# Altium PCB pay-led-2-v3.PcbDoc
Units mm, origin at the board's own origin, x right, y up, seen from the top; angles counter-clockwise.
Board outline 138 x 15 mm, 4 copper layers (Top Layer, GND, PWR, Bottom Layer), stack 0.778 mm thick; 54 components, 47 nets, 155 pads, 55 vias.
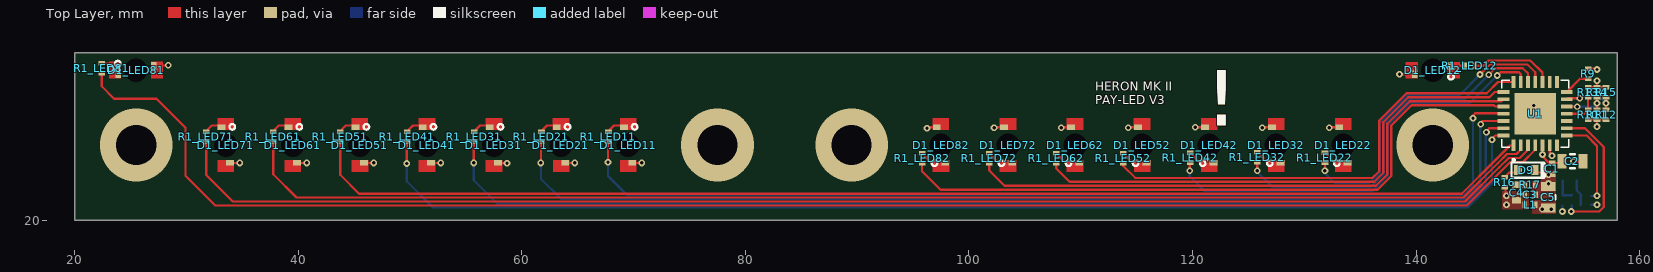
[diagram p0: Top Layer view]
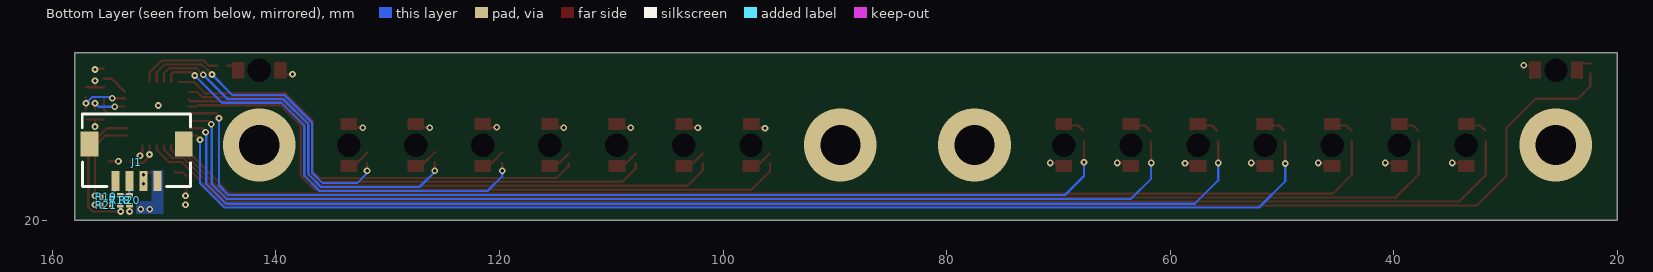
[diagram p1: Bottom Layer view, seen from below]
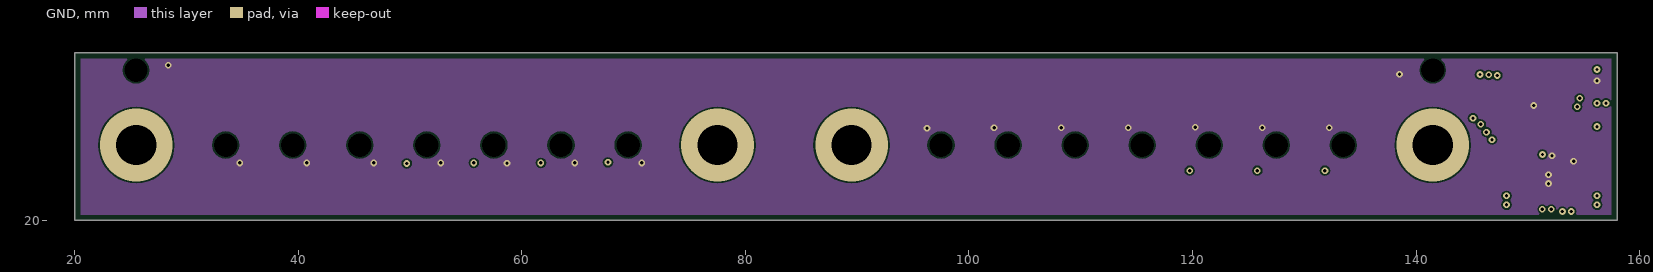
[diagram p2: GND]
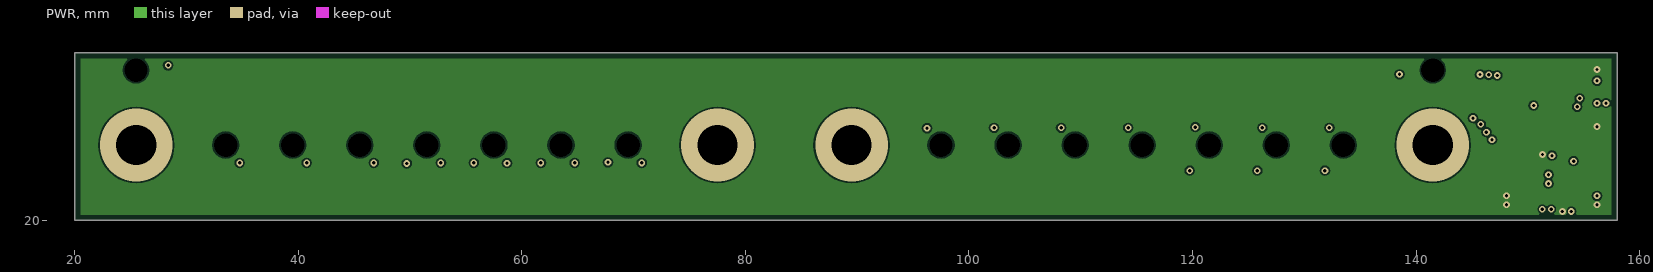
[diagram p3: PWR]
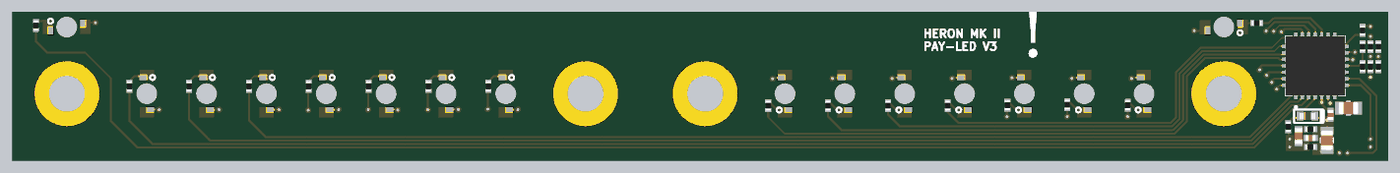
[diagram p4: 3D render of the assembled board from above, using the file's embedded part models]
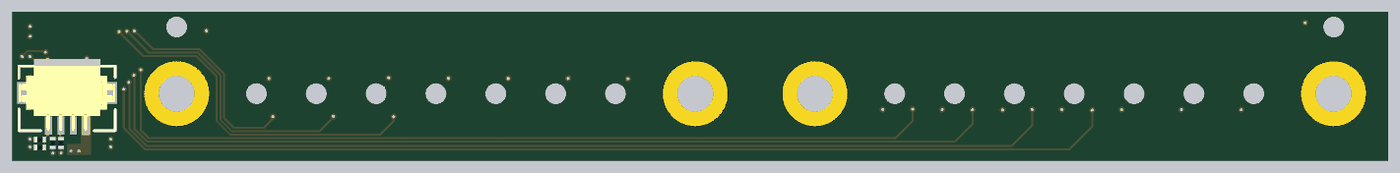
[diagram p5: 3D render of the assembled board from below, using the file's embedded part models]

## Layer stack, top to bottom
Top Solder: solder mask 0.0102, Solder Resist, Dk 3.5
Top Layer: signal copper 0.0356
Dielectric 1: core 0.254, FR-4, Dk 4.2
GND: signal copper 0.036
Dielectric 3: prepreg 0.127, Dk 4.2
PWR: signal copper 0.036
Dielectric 2: core 0.254, Dk 4.2
Bottom Layer: signal copper 0.0356
Bottom Solder: solder mask 0.0102, Solder Resist, Dk 3.5

## Board outline
20,20 158,20 158,35 20,35

## Design rules (kind name [scope] priority, off if disabled: settings)
AssemblyTestPointUsage [All] p1 off:
AssemblyTestpoint [All] p1 off: testpointundercomponent=TRUE minsize=1.016 maxsize=2.54 preferedsize=1.524 minholesize=0 maxholesize=1.016 preferedholesize=0.813 testpointgrid=0.025 usegrid=TRUE gridtolerance=0 allowsidetop=TRUE allowsidebottom=TRUE
BoardOutlineClearance [All] p1: gap=0.5 ignorepadtopadclearanceinfootprint=FALSE
Clearance Component_Clearance [IsComponent vs IsComponent] p1: gap=0.254 ignorepadtopadclearanceinfootprint=FALSE
Clearance [All] p2: gap=0.152 ignorepadtopadclearanceinfootprint=TRUE
FabricationTestPointUsage [All] p1 off: valid=0 allowmultiple=FALSE
FabricationTestpoint [All] p1 off: side=3 testpointundercomponent=FALSE minsize=1.016 maxsize=2.54 preferedsize=1.524 minholesize=0 maxholesize=1.016 preferedholesize=0.813 testpointgrid=0.025 allowsidetop=TRUE allowsidebottom=TRUE usegrid=TRUE gridtolerance=0
HoleSize [All] p1: absolutevalues=TRUE maxlimit=6.3 minlimit=0.3 maxpercent=80.000 minpercent=20.000
HoleToHoleClearance [All] p1: gap=0.2 allowstackedmicrovias=FALSE
MinimumAnnularRing [All] p1: minimumring=0.15
MinimumSolderMaskSliver [All] p1: minsoldermaskwidth=0.1
PlaneClearance [All] p1: clearance=0.381
PlaneConnect [All] p1: planeconnectstyle=Direct reliefexpansion=0.508 reliefentries=4 reliefconductorwidth=0.254 reliefairgap=0.254
PolygonConnect [All] p1: connectstyle=Direct reliefconductorwidth=0.254 reliefentries=4 polygonreliefangle="90 Angle" airgapwidth=0.254
RoomDefinition LED82 [InComponentClass('LED82')] p1: confinementstyle=ConfineIn formatcopy=TRUE lockcomponents=FALSE outline 94.5,24 100.5,24 100.5,29.5 94.5,29.5
RoomDefinition LED81 [InComponentClass('LED81')] p2: confinementstyle=ConfineIn formatcopy=FALSE lockcomponents=FALSE outline 21.9,30.75 29.1,30.75 29.1,36.25 21.9,36.25
RoomDefinition LED72 [InComponentClass('LED72')] p3: confinementstyle=ConfineIn formatcopy=TRUE lockcomponents=FALSE outline 100.5,24 106.5,24 106.5,29.5 100.5,29.5
RoomDefinition LED71 [InComponentClass('LED71')] p4: confinementstyle=ConfineIn formatcopy=FALSE lockcomponents=FALSE outline 30.5,24 36.5,24 36.5,29.5 30.5,29.5
RoomDefinition LED62 [InComponentClass('LED62')] p5: confinementstyle=ConfineIn formatcopy=TRUE lockcomponents=FALSE outline 106.5,24 112.5,24 112.5,29.5 106.5,29.5
RoomDefinition LED61 [InComponentClass('LED61')] p6: confinementstyle=ConfineIn formatcopy=FALSE lockcomponents=FALSE outline 36.5,24 42.5,24 42.5,29.5 36.5,29.5
RoomDefinition LED52 [InComponentClass('LED52')] p7: confinementstyle=ConfineIn formatcopy=TRUE lockcomponents=FALSE outline 112.5,24 118.5,24 118.5,29.5 112.5,29.5
RoomDefinition LED51 [InComponentClass('LED51')] p8: confinementstyle=ConfineIn formatcopy=FALSE lockcomponents=FALSE outline 42.5,24 48.5,24 48.5,29.5 42.5,29.5
RoomDefinition LED42 [InComponentClass('LED42')] p9: confinementstyle=ConfineIn formatcopy=TRUE lockcomponents=FALSE outline 118.5,24 124.5,24 124.5,29.5 118.5,29.5
RoomDefinition LED41 [InComponentClass('LED41')] p10: confinementstyle=ConfineIn formatcopy=FALSE lockcomponents=FALSE outline 48.5,24 54.5,24 54.5,29.5 48.5,29.5
RoomDefinition LED32 [InComponentClass('LED32')] p11: confinementstyle=ConfineIn formatcopy=TRUE lockcomponents=FALSE outline 124.5,24 130.5,24 130.5,29.5 124.5,29.5
RoomDefinition LED31 [InComponentClass('LED31')] p12: confinementstyle=ConfineIn formatcopy=FALSE lockcomponents=FALSE outline 54.5,24 60.5,24 60.5,29.5 54.5,29.5
RoomDefinition LED22 [InComponentClass('LED22')] p13: confinementstyle=ConfineIn formatcopy=TRUE lockcomponents=FALSE outline 130.5,24 136.5,24 136.5,29.5 130.5,29.5
RoomDefinition LED21 [InComponentClass('LED21')] p14: confinementstyle=ConfineIn formatcopy=FALSE lockcomponents=FALSE outline 60.5,24 66.5,24 66.5,29.5 60.5,29.5
RoomDefinition LED12 [InComponentClass('LED12')] p15: confinementstyle=ConfineIn formatcopy=FALSE lockcomponents=FALSE outline 138.75,36.5 138.75,30.5 144.25,30.5 144.25,36.5
RoomDefinition LED11 [InComponentClass('LED11')] p16: confinementstyle=ConfineIn formatcopy=FALSE lockcomponents=FALSE outline 66.5,24 72.5,24 72.5,29.5 66.5,29.5
RoutingVias [All] p1: holewidth=0.3 width=0.6 viastyle="Through Hole" minholewidth=0.2 minwidth=0.6 maxholewidth=6.3 maxwidth=10 useviatemplates=TRUE viatemplateguid#1={CC9E0A90-9CCD-40F9-98FD-64835F8DE6C6} viatemplatename#1=v60h30m0mx0(Tol8-8)
SilkToSilkClearance [All] p1: silktosilkclearance=0
SilkToSolderMaskClearance [IsPad] p1: minsilkscreentomaskgap=0.2 clearancetoexposedcopper=TRUE
SolderMaskExpansion [All] p1: expansion=0.051
UnConnectedPin [All] p1:
UnRoutedNet [All] p1: checkbadconnections=TRUE
Width [All] p1: maxlimit=25.4 minlimit=0.152 preferedwidth=0.2
18 further rules are at their usual default settings.

## Classes and differential pairs
channel class LED: LED11 LED12 LED21 LED22 LED31 LED32 LED41 LED42 LED51 LED52 LED61 LED62 LED71 LED72 LED81 LED82
component class LED82: D1_LED82 R1_LED82
component class LED81: D1_LED81 R1_LED81
component class LED72: D1_LED72 R1_LED72
component class LED71: D1_LED71 R1_LED71
component class LED62: D1_LED62 R1_LED62
component class LED61: D1_LED61 R1_LED61
component class LED52: D1_LED52 R1_LED52
component class LED51: D1_LED51 R1_LED51
component class LED42: D1_LED42 R1_LED42
component class LED41: D1_LED41 R1_LED41
component class LED32: D1_LED32 R1_LED32
component class LED31: D1_LED31 R1_LED31
component class LED22: D1_LED22 R1_LED22
component class LED21: D1_LED21 R1_LED21
component class LED12: D1_LED12 R1_LED12
component class LED11: D1_LED11 R1_LED11
channel class "LED Bank": LED1 LED2
component class TOP: J1 R18 R19 R20 R21
component class PWR: C3 C4 C5 D9 L1 R16 R17
component class PEX: C1 C2 R9 R10 R11 R12 R15 U1

## Components (designator, comment, footprint, x,y, rotation, side; value= is the part's Value field where it differs from the comment)
C1 "0402" CAP0402R 152.2,24.625 r90 top value=0.1uF
C2 "0805" CAP0805R 154,25.3 r180 top value=10uF
C3 "0402" CAP0402R 150.2,22.3 r180 top value=10000pF
C4 "0603" CAP0603R 149,22.5 r270 top value=1uF
C5 "0805" CAP0805R 151.85,22.075 r270 top value=10uF
D1_LED11 "LOP47K" "LB P4SG" 69.5,26.75 r270 top (schematic designator D1)
D1_LED12 "LOP47K" "LB P4SG" 141.5,33.45 r180 top (schematic designator D1)
D1_LED21 "LOP47K" "LB P4SG" 63.5,26.75 r270 top (schematic designator D1)
D1_LED22 "LOP47K" "LB P4SG" 133.5,26.75 r90 top (schematic designator D1)
D1_LED31 "LOP47K" "LB P4SG" 57.5,26.75 r270 top (schematic designator D1)
D1_LED32 "LOP47K" "LB P4SG" 127.5,26.75 r90 top (schematic designator D1)
D1_LED41 "LOP47K" "LB P4SG" 51.5,26.75 r270 top (schematic designator D1)
D1_LED42 "LOP47K" "LB P4SG" 121.5,26.75 r90 top (schematic designator D1)
D1_LED51 "LOP47K" "LB P4SG" 45.5,26.75 r270 top (schematic designator D1)
D1_LED52 "LOP47K" "LB P4SG" 115.5,26.75 r90 top (schematic designator D1)
D1_LED61 "LOP47K" "LB P4SG" 39.5,26.75 r270 top (schematic designator D1)
D1_LED62 "LOP47K" "LB P4SG" 109.5,26.75 r90 top (schematic designator D1)
D1_LED71 "LOP47K" "LB P4SG" 33.5,26.75 r270 top (schematic designator D1)
D1_LED72 "LOP47K" "LB P4SG" 103.5,26.75 r90 top (schematic designator D1)
D1_LED81 "LOP47K" "LB P4SG" 25.475,33.45 r0 top (schematic designator D1)
D1_LED82 "LOP47K" "LB P4SG" 97.5,26.75 r90 top (schematic designator D1)
D9 "LED0603" LED0603 149.875,24.5 r0 top
J1 "DF13A-4P-1.25H(51)" DF13A-4P-1.25H(51) 153.725,25.5 r180 bottom locked
L1 "2A 0402" RES0402R 150.2,21.4 r180 top value="120 Ohm @ 100MHz"
R1_LED11 "0402" RES0402R 67.75,27.5 r90 top value=330 (schematic designator R1)
R1_LED12 "0402" RES0402R 144.8,33.85 r180 top value=330 (schematic designator R1)
R1_LED21 "0402" RES0402R 61.75,27.5 r90 top value=330 (schematic designator R1)
R1_LED22 "0402" RES0402R 131.85,25.6 r90 top value=330 (schematic designator R1)
R1_LED31 "0402" RES0402R 55.75,27.5 r90 top value=330 (schematic designator R1)
R1_LED32 "0402" RES0402R 125.8,25.65 r90 top value=330 (schematic designator R1)
R1_LED41 "0402" RES0402R 49.75,27.5 r90 top value=330 (schematic designator R1)
R1_LED42 "0402" RES0402R 119.8,25.6 r90 top value=330 (schematic designator R1)
R1_LED51 "0402" RES0402R 43.75,27.5 r90 top value=330 (schematic designator R1)
R1_LED52 "0402" RES0402R 113.812,25.55 r90 top value=330 (schematic designator R1)
R1_LED61 "0402" RES0402R 37.75,27.5 r90 top value=330 (schematic designator R1)
R1_LED62 "0402" RES0402R 107.812,25.55 r90 top value=330 (schematic designator R1)
R1_LED71 "0402" RES0402R 31.75,27.5 r90 top value=330 (schematic designator R1)
R1_LED72 "0402" RES0402R 101.812,25.55 r90 top value=330 (schematic designator R1)
R1_LED81 "0402" RES0402R 22.4,33.6 r90 top value=330 (schematic designator R1)
R1_LED82 "0402" RES0402R 95.812,25.55 r90 top value=330 (schematic designator R1)
R9 "0402" RES0402R 155.4,33.12 r90 top value=10K
R10 "0402" RES0402R 155.4,29.475 r270 top value=0
R11 "0402" RES0402R 156.2,29.475 r270 top value=0
R12 "0402" RES0402R 157,29.475 r270 top value=0
R13 "0402" RES0402R 155.4,31.475 r270 top value=0
R14 "0402" RES0402R 156.2,31.475 r270 top value=0
R15 "0402" RES0402R 157,31.475 r270 top value=0
R16 "0402" RES0402R 147.95,23.425 r270 top value=330
R17 "0402" RES0402R 150.2,23.2 r180 top value=2
R18 "0402" RES0402R 153.925,21.8 r270 bottom value=0
R19 "0402" RES0402R 155.2,22.125 r0 bottom value=0
R20 "0402" RES0402R 153.1,21.8 r270 bottom value=1K5
R21 "0402" RES0402R 155.2,21.35 r0 bottom value=1K5
U1 "MCP23017-QFN" QFN65P600X600X100-29 150.665,29.55 r90 top locked

## Footprints (in the part's own frame and the unit in brackets; to place one, negate y for a bottom-side part, rotate by r counter-clockwise, add the part's x,y. Pads: shape width x height; smd on the part's side, far side on the other; paste and mask are expansions set on the pad)
CAP0402R [mm] "Capacitor 0402 reflow soldering"
  rect 0.45x0.6 smd mask+0: 1(-0.5,0) 2(0.5,0)
  body extent -0.5,-0.3 0.5,0.3, height 0.2
CAP0603R [mm] "capacitor 0603 reflow soldering"
  rect 0.6x0.8 smd mask+0: 1(-0.7,0) 2(0.7,0)
  body extent -0.8,-0.4 0.8,0.4, height 0.3
CAP0805R [mm] "capacitor 0805 reflow soldering"
  rect 0.8x1.3 smd mask+0: 1(-0.95,0) 2(0.95,0)
  silkscreen extent -0.2,-0.63 0.2,0.63, body extent -1,-0.62 1,0.63, height 0.78
DF13A-4P-1.25H(51) [mm] "4 pos, 1.25mm pitch DF13 connector (H125779CT-ND)"
  rect 0.7x1.8 smd: 1(-0.625,-1.956) 2(0.625,-1.956) 3(1.875,-1.956) 4(3.125,-1.956)
  rect 1.6x2.2 smd: ""(-2.975,1.344) ""(5.475,1.344)
  silkscreen extent -3.61,-2.46 6.06,4.04, body extent -3.61,-2.46 6.04,4.75, height 3.58
"LB P4SG" [mm] "Footprint for a reverse-mount Osram LED"
  rect 0.5x0.7 smd mask+0.102: 1(-1.6,-0.375) 2(1.6,0.375)
  round 0.7 hole 2.1 unplated: ""(0,0)
  Top Layer region: -2.406,-0.717 -1.353,-0.717 -1.353,0.731 -2.406,0.731
  Top Layer region: 1.346,-0.711 2.4,-0.711 2.4,0.737 1.346,0.737
  silkscreen extent -1.88,0.34 -1.38,0.83
LED0603 [mm] "0603 LED footprint, thick line on the cathode"
  rect 0.7x0.9 smd: 1(-0.75,0) 2(0.75,0)
  silkscreen extent -1.32,-0.67 1.52,0.67, body extent -0.8,-0.4 0.8,0.4, height 0.71
QFN65P600X600X100-29 [mm] "QFN + Pitch P + Body With X Body Length X Height - #Pins"
  rect 1.04x0.33 smd: 1(-2.835,1.95) 2(-2.835,1.3) 3(-2.835,0.65) 4(-2.835,0) 5(-2.835,-0.65) 6(-2.835,-1.3) 7(-2.835,-1.95) 15(2.835,-1.95) 16(2.835,-1.3) 17(2.835,-0.65) 18(2.835,0) 19(2.835,0.65) 20(2.835,1.3) 21(2.835,1.95)
  rect 0.33x1.04 smd: 8(-1.95,-2.835) 9(-1.3,-2.835) 10(-0.65,-2.835) 11(0,-2.835) 12(0.65,-2.835) 13(1.3,-2.835) 14(1.95,-2.835) 22(1.95,2.835) 23(1.3,2.835) 24(0.65,2.835) 25(0,2.835) 26(-0.65,2.835) 27(-1.3,2.835) 28(-1.95,2.835)
  rect 3.7x3.7 smd: 29(0,0)
  silkscreen extent -4.24,-3 3,3, body extent -3.05,-3.05 3.05,3.05, height 1
RES0402R [mm] "resistor 0402 reflow soldering"
  rect 0.4x0.6 smd mask+0: 1(-0.45,0) 2(0.45,0)
  body extent -0.5,-0.25 0.5,0.25, height 0.3

## Part data
C1: library part CAP0402, "0402 capacitor", Capacitance=100nF, Case Code (Metric)=1005, Dielectric=X7R, Manufacturer="Taiyo Yuden", Manufacturer Part Number=EMK105B7104KVHF, Max Operating Temperature=125°C, Min Operating Temperature=-55°C, Package Quantity=10000, Ratings=AEC-Q200, Supplier Part Number 1=587-3807-1-ND, Tolerance=10%, Voltage Rating=16V, Case/Package=0402, Case Code (Imperial)=0402, Halogen Free="Halogen Free", Height=0.5mm, Lead Free="Lead Free", Length=0.039inch, Mount="Surface Mount", Packaging="Tape and Reel", Pricing 1="1=0.1, 10=0.057, 100=0.0254, 500=0.01812, 1000=0.01423, 2500=0.01294, 5000=0.0119 (USD)", Stock 1=18196, Supplier 1=Digi-Key, Termination=SMD/SMT, Thickness=0.022inch, Voltage Rating (DC)=16V, Weight=2.3E-05oz, Width=0.02inch
C2 C5: library part CAP0805, "0805 capacitor", Capacitance=10uF, Dielectric=X7R, Manufacturer=Murata, Manufacturer Part Number=GCM21BR70J106KE22K, Max Operating Temperature=125°C, Min Operating Temperature=-55°C, Supplier Part Number 1=490-14361-1-ND, Tolerance=10%, Voltage Rating (DC)=6.3V, Case/Package=0805, Depth=1.25mm, Lead Free="Lead Free", Length=2mm, Packaging="Tape and Reel", Pricing 1="1=0.42, 10=0.29, 100=0.1742, 500=0.13064, 1000=0.11031, 2500=0.10451, 5000=0.0987 (USD)", Stock 1=214938, Supplier 1=Digi-Key
C3: library part CAP0402, "0402 capacitor", Capacitance=10nF, Case Code (Metric)=1005, Dielectric=X7R, Manufacturer=Murata, Manufacturer Part Number=GCM155R71H103KA55D, Max Operating Temperature=125°C, Min Operating Temperature=-55°C, Package Quantity=1, Ratings=AEC-Q200, Supplier Part Number 1=490-4762-1-ND, Tolerance=10%, Voltage=50V, Case/Package=0402, Case Code (Imperial)=0402, ComponentLink1Description=http://psearch.murata.com/capacitor/product/GCM155R71H103KA55%23.pdf?src-supplier=Future+Electronics, ComponentLink1URL=http://psearch.murata.com/capacitor/product/GCM155R71H103KA55%23.pdf?src-supplier=Future+Electronics, ComponentLink2Description=https://www.verical.com/server-webapp/html/getDatasheet?partID=27433&src-supplier=Verical, ComponentLink2URL=https://www.verical.com/server-webapp/html/getDatasheet?partID=27433&src-supplier=Verical, ComponentLink3Description=http://psearch.en.murata.com/capacitor/product/GCM155R71H103KA55%23.pdf?src-supplier=Avnet, ComponentLink3URL=http://psearch.en.murata.com/capacitor/product/GCM155R71H103KA55%23.pdf?src-supplier=Avnet, ComponentLink4Description=http://psearch.murata.com/capacitor/product/GCM155R71H103KA55%23.pdf?src-supplier=Avnet+Europe, ComponentLink4URL=http://psearch.murata.com/capacitor/product/GCM155R71H103KA55%23.pdf?src-supplier=Avnet+Europe, ComponentLink5Description=http://search.murata.co.jp/Ceramy/image/img/A01X/partnumbering_e_02.pdf?src-supplier=Digi-Key, ComponentLink5URL=http://search.murata.co.jp/Ceramy/image/img/A01X/partnumbering_e_02.pdf?src-supplier=Digi-Key, ComponentLink6Description=http://uk.rs-online.com/webdocs/0ef9/0900766b80ef92d0.pdf?src-supplier=RSComponents, ComponentLink6URL=http://uk.rs-online.com/webdocs/0ef9/0900766b80ef92d0.pdf?src-supplier=RSComponents, Depth=0.5mm, Height=0.5mm, Lead Free="Lead Free", Length=1mm, Mount="Surface Mount", Packaging="Tape and Reel", Pricing 1="1=0.1, 10=0.042, 100=0.0188, 500=0.01344, 1000=0.01056, 2500=0.0096, 5000=0.00883 (USD)", Radiation Hardening=No, REACH SVHC="No SVHC", Stock 1=23977554, Supplier 1=Digi-Key, Termination=SMD/SMT, Thickness=0.022inch, Voltage Rating=50V, Voltage Rating (DC)=50V, Width=0.02inch
C4: library part CAP0603, "0603 capacitor", Capacitance=1uF, Case Code (Metric)=1608, Manufacturer=KEMET, Manufacturer Part Number=C0603C105K4RACAUTO, Max Operating Temperature=125°C, Min Operating Temperature=-55°C, Ratings=AEC-Q200, Supplier Part Number 1=399-17704-1-ND, Tolerance=10%, Voltage Rating=16V, Case/Package=0603, Case Code (Imperial)=0603, Mount="Surface Mount", Packaging="Cut Tape", Pricing 1="1=0.17, 10=0.12, 100=0.0564, 500=0.03952, 1000=0.03273 (USD)", Stock 1=376276, Supplier 1=Digi-Key
D1_LED11 D1_LED12 D1_LED21 D1_LED22 D1_LED31 D1_LED32 D1_LED41 D1_LED42 D1_LED51 D1_LED52 D1_LED61 D1_LED62 D1_LED71 D1_LED72 D1_LED81 D1_LED82: library part "LO P47K", "LED ORANGE CLEAR SMD BOTTOM ENTRY", Supplier Part Number 1=475-3758-1-ND, Supplier 1=Digi-Key
D9: "Generic 0603 LED. Use ChipLED from Osram for generic ones.", Case/Package=SMD/SMT, Color=Green, Colour=GREEN, Forward Current=15mA, Forward Voltage=3.2V, Manufacturer="Osram Opto", Manufacturer Part Number=LTQ39G-Q1OO-25-1, Max Operating Temperature=85°C, Min Operating Temperature=-40°C, Reverse Voltage=5V, Supplier Part Number 1=475-3442-1-ND, Test Current=5mA, Depth=0.9mm, Dominant Wavelength=530nm, Length=1.7mm, Lens Style=Diffused,Colorless,Rectangular, Luminous Flux=0.55lm, Luminous Intensity=280mcd, Mount="Surface Mount", Number of Elements=1, Number of LEDs=1, Number of Pins=2, Packaging="Tape and Reel", Pricing 1="1=0.45, 10=0.327, 25=0.2668, 100=0.2134, 250=0.18004, 500=0.15336, 1000=0.12002 (USD)", Radiation Hardening=No, Stock 1=27630, Supplier 1=Digi-Key
J1: "4 pos DF13 right angle surface mount connector", Supplier Part Number 1=H125779CT-ND, Supplier 1=Digi-Key
L1: library part Inductor, "Inductor", Case/Package=0402, Case Code (Metric)=1005, DC Resistance (DCR)=55mR, Manufacturer=Murata, Manufacturer Part Number=BLM15PX121SZ1D, Max Current Rating=2A, Max Operating Temperature=125°C, Min Operating Temperature=-55°C, Ratings=AEC-Q200, Supplier Part Number 1=490-16505-1-ND, Case Code (Imperial)=0402, Code_IEC=1005, Code_JEITA=0402, LatestRevisionDate=29-May-2009, LatestRevisionNote="IPC-7351 Footprint Added.", Mount="Surface Mount", Number of Lines=1, PackageDescription="Chip Inductor", PackageReference=0402-A, Packaging="Cut Tape", Pricing 1="1=0.15, 10=0.125, 25=0.0972, 50=0.0804, 100=0.0693, 250=0.05544, 500=0.0499, 1000=0.04158, 5000=0.03881 (USD)", Published=8-Jun-2000, Publisher="Altium Limited", Stock 1=18936, Supplier 1=Digi-Key
R1_LED11 R1_LED12 R1_LED21 R1_LED22 R1_LED31 R1_LED32 R1_LED41 R1_LED42 R1_LED51 R1_LED52 R1_LED61 R1_LED62 R1_LED71 R1_LED72 R1_LED81 R1_LED82 R16: library part RES0402, "0402 resistor", Case Code (Metric)=1005, Manufacturer="TE Connectivity", Manufacturer Part Number=CRGCQ0402F330R, Max Operating Temperature=155°C, Max Power Dissipation=63mW, Min Operating Temperature=-55°C, Resistance=330R, Supplier Part Number 1=A129621CT-ND, Temperature Coefficient=100ppm/°C, Tolerance=1%, Case/Package=0402, Case Code (Imperial)=0402, Composition="Thick Film", Features="Moisture Resistant,Automotive AEC-Q200", Number of Terminations=2, Packaging="Tape and Reel", Pricing 1="1=0.1, 10=0.022, 100=0.009, 1000=0.00406, 2500=0.00352, 5000=0.00291 (USD)", Stock 1=224275, Supplier 1=Digi-Key
R9: library part RES0402, "0402 resistor", Case Code (Metric)=1005, Manufacturer=Panasonic, Manufacturer Part Number=ERJ-2RKF1002X, Max Operating Temperature=155°C, Max Power Dissipation=100mW, Min Operating Temperature=-55°C, Package Quantity=1, Resistance=10kR, Supplier Part Number 1=P10.0KLCT-ND, Temperature Coefficient=100ppm/°C, Tolerance=1%, Voltage Rating=50V, Case/Package=0402, Case Code (Imperial)=0402, ComponentLink1Description=http://industrial.panasonic.com/www-data/pdf/AOA0000/AOA0000CE2.pdf?src-supplier=Future+Electronics, ComponentLink1URL=http://industrial.panasonic.com/www-data/pdf/AOA0000/AOA0000CE2.pdf?src-supplier=Future+Electronics, ComponentLink2Description=http://industrial.panasonic.com/www-data/pdf/AOA0000/AOA0000CE2.pdf?src-supplier=Avnet+Europe, ComponentLink2URL=http://industrial.panasonic.com/www-data/pdf/AOA0000/AOA0000CE2.pdf?src-supplier=Avnet+Europe, ComponentLink3Description=https://industrial.panasonic.com/cdbs/www-data/pdf/RDA0000/DMA0000COL11.pdf?src-supplier=Mouser, ComponentLink3URL=https://industrial.panasonic.com/cdbs/www-data/pdf/RDA0000/DMA0000COL11.pdf?src-supplier=Mouser, ComponentLink4Description=http://www.farnell.com/datasheets/1678782.pdf?src-supplier=Element14, ComponentLink4URL=http://www.farnell.com/datasheets/1678782.pdf?src-supplier=Element14, ComponentLink5Description=http://www.farnell.com/datasheets/1911175.pdf?src-supplier=Farnell, ComponentLink5URL=http://www.farnell.com/datasheets/1911175.pdf?src-supplier=Farnell, ComponentLink6Description=http://www.jameco.com/Jameco/Products/ProdDS/1987020.pdf?src-supplier=Jameco, ComponentLink6URL=http://www.jameco.com/Jameco/Products/ProdDS/1987020.pdf?src-supplier=Jameco, ComponentLink7Description=http://industrial.panasonic.com/www-data/pdf/AOA0000/AOA0000CE2.pdf?src-supplier=Avnet, ComponentLink7URL=http://industrial.panasonic.com/www-data/pdf/AOA0000/AOA0000CE2.pdf?src-supplier=Avnet, ComponentLink8Description=http://www.alliedelec.com/m/d/623f45ff1957d936ff56d46fd1c28cac.pdf?src-supplier=Allied+Electronics, ComponentLink8URL=http://www.alliedelec.com/m/d/623f45ff1957d936ff56d46fd1c28cac.pdf?src-supplier=Allied+Electronics, Composition="Thick Film", Contact Plating=Tin, Depth=0.5mm, Features="Automotive AEC-Q200", Height=0.35mm, Lead Free="Lead Free", Length=1mm, Military Standard=Not, Mount="Surface Mount", Number of Pins=2, Number of Terminations=2, Packaging="Tape and Reel", Power Rating=100mW, Pricing 1="1=0.1, 10=0.045, 100=0.0183, 1000=0.00823, 2500=0.00715, 5000=0.0059 (USD)", Radiation Hardening=No, REACH SVHC="No SVHC", Stock 1=14350001, Supplier 1=Digi-Key, Termination=SMD/SMT, Voltage Rating (DC)=50V, Width=0.02inch
R10 R11 R12 R13 R14 R15 R18 R19: library part RES0402, "0402 resistor", Case Code (Metric)=1005, Manufacturer=Panasonic, Manufacturer Part Number=ERJ-2GE0R00X, Max Operating Temperature=155°C, Max Power Dissipation=100mW, Min Operating Temperature=-55°C, Package Quantity=1, Resistance=0mR, Supplier Part Number 1=P0.0JCT-ND, Temperature Coefficient=600ppm/°C, Tolerance=5%, Voltage Rating=50V, Case/Package=0402, Case Code (Imperial)=0402, ComponentLink1Description=http://industrial.panasonic.com/www-data/pdf/AOA0000/AOA0000CE1.pdf?src-supplier=Avnet, ComponentLink1URL=http://industrial.panasonic.com/www-data/pdf/AOA0000/AOA0000CE1.pdf?src-supplier=Avnet, ComponentLink2Description=http://www.alliedelec.com/m/d/51cd0790071e1666bdb9d00c57fcf960.pdf?src-supplier=Allied+Electronics, ComponentLink2URL=http://www.alliedelec.com/m/d/51cd0790071e1666bdb9d00c57fcf960.pdf?src-supplier=Allied+Electronics, ComponentLink3Description=http://industrial.panasonic.com/www-data/pdf/AOA0000/AOA0000CE1.pdf?src-supplier=Avnet+Europe, ComponentLink3URL=http://industrial.panasonic.com/www-data/pdf/AOA0000/AOA0000CE1.pdf?src-supplier=Avnet+Europe, ComponentLink4Description=http://www.farnell.com/datasheets/2059623.pdf?src-supplier=Farnell, ComponentLink4URL=http://www.farnell.com/datasheets/2059623.pdf?src-supplier=Farnell, ComponentLink5Description=http://www.farnell.com/datasheets/2059623.pdf?src-supplier=Element14, ComponentLink5URL=http://www.farnell.com/datasheets/2059623.pdf?src-supplier=Element14, ComponentLink6Description=http://www.farnell.com/datasheets/1678796.pdf?src-supplier=Element14, ComponentLink6URL=http://www.farnell.com/datasheets/1678796.pdf?src-supplier=Element14, Composition="Thick Film", Contact Plating=Tin, Depth=0.5mm, Features="Automotive AEC-Q200", Height=0.35mm, Lead Free="Lead Free", Length=1mm, Military Standard=Not, Mount="Surface Mount", Number of Terminations=2, Packaging="Tape and Reel", Power Rating=100mW, Pricing 1="1=0.1, 10=0.03, 25=0.0216, 50=0.0164, 100=0.0121, 250=0.00924, 500=0.0074, 1000=0.00545, 5000=0.00391 (USD)", Radiation Hardening=No, REACH SVHC="No SVHC", Stock 1=47740000, Supplier 1=Digi-Key, Termination=SMD/SMT, Voltage Rating (DC)=50V, Width=0.02inch
R17: library part RES0402, "0402 resistor", Case Code (Metric)=1005, Manufacturer=Yageo, Manufacturer Part Number=AC0402FR-072RL, Max Operating Temperature=155°C, Max Power Dissipation=63mW, Min Operating Temperature=-55°C, Resistance=2R, Supplier Part Number 1=YAG3472CT-ND, Temperature Coefficient=200ppm/°C, Tolerance=1%, Case/Package=0402, Case Code (Imperial)=0402, Composition="Thick Film", Features="Moisture Resistant,Automotive AEC-Q200", Height=0.015inch, Length=0.039inch, Number of Terminations=2, Packaging="Tape and Reel", Pricing 1="1=0.1, 10=0.03, 100=0.012, 1000=0.0054, 2500=0.00468, 5000=0.00387 (USD)", Stock 1=17701, Supplier 1=Digi-Key, Width=0.02inch
R20 R21: library part RES0402, "0402 resistor"
U1: Supplier Part Number 1=MCP23017-E/ML-ND, Supplier 1=Digi-Key

## Via types
v1: diameter 0.6, hole 0.3, Top Layer to Bottom Layer, tented both sides, 51 vias
v2: diameter 6.5, hole 3.6, Top Layer to Bottom Layer, 4 vias

## Nets (pads, with @x,y where several pads share a name; then routed paths per layer and width w, separated by ;. In a path a pad name is that pad's centre, name@x,y a point inside that pad or via, vN(x,y) a via of type N, cw(c..) or ccw(c..) an arc to the next point about the centre after c; other vN are vias at no path point)
A0: R10.1 R13.2 U1.11 | length 3.2
  Top Layer w0.2: U1.11 155.025,29.55 R10.1 R13.2
A1: R11.1 R14.2 U1.12 | length 3.9
  Top Layer w0.2: U1.12 154.4,30.2 v1(154.425,30.175) ; R11.1 R14.2
  Bottom Layer w0.2: v1(154.425,30.175) 155.875,30.175 v1(156.2,30.5)
A2: R12.1 R15.2 U1.13 | length 4.9
  Top Layer w0.2: U1.13 153.577,30.927 v1(154.648,30.927) ; R12.1 R15.2
  Bottom Layer w0.2: v1(154.648,30.927) 154.773,31.052 156.448,31.052 v1(157,30.5)
GND: C1.1 C2.1 C3.1 C5.1 D1_LED11.2 D1_LED12.2 D1_LED21.2 D1_LED22.2 D1_LED31.2 D1_LED32.2 D1_LED41.2 D1_LED42.2 D1_LED51.2 D1_LED52.2 D1_LED61.2 D1_LED62.2 D1_LED71.2 D1_LED72.2 D1_LED81.2 D1_LED82.2 D9.2 J1.3 R13.1 R14.1 R15.1 R17.1 U1.6 U1.29 | length 20.4
  Top Layer w0.2: D1_LED81.2@27.1,33.875 v1(28.35,33.875) ; D1_LED71.2 v1(34.75,25.15) ; D1_LED61.2 v1(40.75,25.15) ; D1_LED51.2 v1(46.75,25.15) ; D1_LED41.2 v1(52.75,25.15) ; D1_LED31.2 58.65,25.15 v1(58.675,25.125) ; D1_LED21.2 v1(64.725,25.15) ; D1_LED11.2 v1(70.725,25.15) ; v1(96.25,28.25) 96.35,28.35 D1_LED82.2 ; v1(102.25,28.29) 102.31,28.35 D1_LED72.2 ; v1(108.25,28.29) 108.31,28.35 D1_LED62.2 ; v1(114.25,28.29) 114.31,28.35 D1_LED52.2 ; v1(120.25,28.35) D1_LED42.2 ; v1(126.25,28.29) 126.31,28.35 D1_LED32.2 ; v1(132.25,28.29) 132.31,28.35 D1_LED22.2 ; v1(138.525,33.075) D1_LED12.2 ; D9.2@150.5,24.35 150.55,24.3 151.65,24.3 v1(151.85,24.1) ; U1.6 151.965,26 v1(152.162,25.802) ; v1(154.1,25.3) C2.1 ; R13.1 R14.1 ; v1(156.2,32.5) R14.1 ; R15.1 R14.1
  other v1: 151.85,23.3 150.525,30.285
GPA0: R1_LED12.1 U1.17 | length 7.6
  Top Layer w0.2: R1_LED12.1 146.027,33.85 146.494,34.317 150.233,34.317 151.315,33.235 U1.17
GPA1: R1_LED22.1 U1.18 | length 28.3
  Top Layer w0.2: v1(131.85,24.45) R1_LED22.1 ; v1(145.732,33.057) 146.64,33.965 149.96,33.965 150.665,33.26 U1.18
  Bottom Layer w0.2: v1(131.85,24.45) 131.85,24.215 132.725,23.34 135.819,23.34 136.77,24.292 136.77,28.767 139.233,31.23 143.905,31.23 v1(145.732,33.057)
GPA2: R1_LED32.1 U1.19 | length 33.6
  Top Layer w0.2: v1(125.8,24.45) R1_LED32.1 ; v1(146.5,33.025) 147.087,33.612 149.563,33.612 150.015,33.16 U1.19
  Bottom Layer w0.2: v1(125.8,24.45) 125.8,24.338 127.15,22.988 135.965,22.988 137.123,24.146 137.123,28.621 139.379,30.877 144.334,30.877 146.481,33.025 v1(146.5,33.025)
GPA3: R1_LED42.1 U1.20 | length 39.2
  Top Layer w0.2: v1(119.75,24.45) 119.75,25.1 R1_LED42.1 ; v1(147.275,32.975) 147.56,33.26 149.215,33.26 149.365,33.11 U1.20
  Bottom Layer w0.2: v1(119.75,24.45) 119.75,23.961 121.075,22.636 136.111,22.636 137.475,24 137.475,28.475 139.525,30.525 144.825,30.525 v1(147.275,32.975)
GPA4: R1_LED52.1 U1.21 | length 41.8
  Top Layer w0.2: R1_LED52.1 113.812,24.873 114.875,23.81 136.115,23.81 136.718,24.413 136.718,28.938 139.153,31.373 146.33,31.373 147.343,32.385 U1.21
GPA5: R1_LED62.1 U1.22 | length 46.9
  Top Layer w0.2: R1_LED62.1 107.812,24.646 109,23.457 136.26,23.457 137.07,24.267 137.07,28.792 139.298,31.02 146.568,31.02 147.048,31.5 U1.22
GPA6: R1_LED72.1 U1.23 | length 53.1
  Top Layer w0.2: R1_LED72.1 101.812,24.468 103.175,23.105 136.406,23.105 137.423,24.121 137.423,28.646 139.444,30.668 147.648,30.668 U1.23
GPA7: R1_LED82.1 U1.24 | length 59.2
  Top Layer w0.2: R1_LED82.1 95.812,24.391 97.45,22.752 136.552,22.752 137.775,23.975 137.775,28.5 139.59,30.315 146.985,30.315 147.1,30.2 U1.24
GPB0: R1_LED11.1 U1.25 | length 90.5
  Top Layer w0.2: v1(67.7,25.2) 67.7,27 R1_LED11.1 ; v1(145.1,29.15) 145.1,29.4 145.3,29.6 U1.25@147.69,29.6
  Bottom Layer w0.2: v1(67.7,25.2) 67.7,23.983 69.4,22.283 144.262,22.283 145.1,23.122 v1(145.1,29.15)
GPB1: R1_LED21.1 U1.26 | length 96.1
  Top Layer w0.2: v1(61.7,25.15) 61.7,27 R1_LED21.1 ; v1(145.8,28.6) 145.8,28.75 145.95,28.9 U1.26@147.69,28.9
  Bottom Layer w0.2: v1(61.7,25.15) 61.7,23.731 63.5,21.931 144.407,21.931 145.748,23.271 145.748,28.548 v1(145.8,28.6)
GPB2: R1_LED31.1 U1.27 | length 101.9
  Top Layer w0.2: v1(55.7,25.15) 55.7,27 R1_LED31.1 ; v1(146.3,27.9) 146.3,28 146.55,28.25 U1.27@147.69,28.25
  Bottom Layer w0.2: v1(55.7,25.15) 55.7,23.6 57.798,21.502 144.477,21.502 146.248,23.273 146.248,27.848 v1(146.3,27.9)
GPB3: R1_LED41.1 U1.28 | length 107.5
  Top Layer w0.2: v1(49.7,25.1) 49.7,27 R1_LED41.1 ; v1(146.8,27.225) 146.8,27.3 147.1,27.6 U1.28@147.69,27.6
  Bottom Layer w0.2: v1(49.7,25.1) 49.7,23.5 52.05,21.15 144.625,21.15 146.8,23.325 v1(146.8,27.225)
GPB4: R1_LED51.1 U1.1 | length 110.4
  Top Layer w0.2: R1_LED51.1 43.75,24.08 45.43,22.4 144.098,22.4 147.158,25.46 147.161,25.46 148.417,26.715 U1.1
GPB5: R1_LED61.1 U1.2 | length 117.6
  Top Layer w0.2: R1_LED61.1 37.75,24.127 39.83,22.048 144.244,22.048 147.304,25.107 147.307,25.107 148.14,25.94 148.982,25.94 149.365,26.323 U1.2
GPB6: R1_LED71.1 U1.3 | length 124.5
  Top Layer w0.2: R1_LED71.1 31.75,24.075 34.13,21.695 144.39,21.695 147.449,24.755 147.453,24.755 148.286,25.588 149.28,25.588 150.015,26.323 U1.3
GPB7: R1_LED81.1 U1.4 | length 138.8
  Top Layer w0.2: R1_LED81.1 22.4,32 23.5,30.9 27.3,30.9 29.9,28.3 29.9,24 32.557,21.343 144.536,21.343 147.595,24.402 147.599,24.402 148.432,25.235 149.577,25.235 150.665,26.323 U1.4
INTA: U1.16
INTB: U1.15
NetC4_1: C4.1 R17.2
NetD1_LED11_1: D1_LED11.1 R1_LED11.2 | length 1.9
  Top Layer w0.2: R1_LED11.2@67.8,28.05 68.25,28.5 69.5,28.5
NetD1_LED12_1: D1_LED12.1 R1_LED12.2 | length 1.2
  Top Layer w0.2: D1_LED12.1@143.125,33.875 143.15,33.85 R1_LED12.2
NetD1_LED21_1: D1_LED21.1 R1_LED21.2 | length 2
  Top Layer w0.2: R1_LED21.2 61.75,28 62.25,28.5 63.5,28.5
NetD1_LED22_1: D1_LED22.1 R1_LED22.2 | length 2.4
  Top Layer w0.2: R1_LED22.2 132.75,25.15 D1_LED22.1
NetD1_LED31_1: D1_LED31.1 R1_LED31.2 | length 1.9
  Top Layer w0.2: R1_LED31.2@55.8,28.05 56.25,28.5 57.5,28.5
NetD1_LED32_1: D1_LED32.1 R1_LED32.2 | length 2.5
  Top Layer w0.2: R1_LED32.2 126.75,25.15 D1_LED32.1
NetD1_LED41_1: D1_LED41.1 R1_LED41.2 | length 1.9
  Top Layer w0.2: R1_LED41.2@49.8,28.05 50.25,28.5 51.5,28.5
NetD1_LED42_1: D1_LED42.1 R1_LED42.2 | length 2.4
  Top Layer w0.2: R1_LED42.2 120.7,25.15 D1_LED42.1
NetD1_LED51_1: D1_LED51.1 R1_LED51.2 | length 1.9
  Top Layer w0.2: R1_LED51.2@43.8,28.05 44.25,28.5 45.5,28.5
NetD1_LED52_1: D1_LED52.1 R1_LED52.2 | length 2.4
  Top Layer w0.2: R1_LED52.2 114.662,25.15 D1_LED52.1
NetD1_LED61_1: D1_LED61.1 R1_LED61.2 | length 1.9
  Top Layer w0.2: R1_LED61.2@37.8,28.05 38.25,28.5 39.5,28.5
NetD1_LED62_1: D1_LED62.1 R1_LED62.2 | length 2.4
  Top Layer w0.2: R1_LED62.2 108.662,25.15 D1_LED62.1
NetD1_LED71_1: D1_LED71.1 R1_LED71.2 | length 1.9
  Top Layer w0.2: R1_LED71.2@31.8,28.05 32.25,28.5 33.5,28.5
NetD1_LED72_1: D1_LED72.1 R1_LED72.2 | length 2.4
  Top Layer w0.2: R1_LED72.2 102.662,25.15 D1_LED72.1
NetD1_LED81_1: D1_LED81.1 R1_LED81.2 | length 1.3
  Top Layer w0.2: R1_LED81.2 23.425,34.05 23.6,33.875
NetD1_LED82_1: D1_LED82.1 R1_LED82.2 | length 2.4
  Top Layer w0.2: R1_LED82.2 96.662,25.15 D1_LED82.1
NetD9_1: D9.1 R16.1 | length 1.2
  Top Layer w0.2: R16.1@148,23.95 148.35,24.3 D9.1@149.05,24.3
RST_N: R9.1 U1.14 | length 2.4
  Top Layer w0.2: U1.14 154.67,32.67 R9.1
SCL: R19.2 U1.8 | length 8.2
  Top Layer w0.2: U1.8@153.36,27.6 155.272,27.6 156.2,26.672 v1(156.2,22.2)
  Bottom Layer w0.2: R19.2@155.65,22.2 v1(156.2,22.2)
SCL_IN: J1.1 R19.1 R21.1 | length 2.3
  Bottom Layer w0.2: J1.1@154.375,23.544 154.375,22.675 R19.1@154.8,22.25 ; R21.1@154.75,21.4 R19.1@154.75,22.2
SDA: R18.2 U1.9 | length 13.1
  Top Layer w0.2: U1.9@153.36,28.25 U1.9 155.12,28.25 156.8,26.57 156.8,21.2 156.4,20.8 v1(153.9,20.8)
  Bottom Layer w0.2: v1(153.9,20.8) 153.925,20.825 R18.2
SDA_IN: J1.2 R18.1 R20.1 | length 2.1
  Bottom Layer w0.2: J1.2@153.125,23.544 153.125,22.275 R20.1 R18.1
VCC3V3_S: C1.2 C2.2 C3.2 C4.2 L1.2 R9.2 R10.2 R11.2 R12.2 R16.2 R20.2 R21.2 U1.5 | length 7.9
  Top Layer w0.2: R16.2@148,23.05 148,22.3 v1(148.1,22.2) ; v1@151.3,25.925 151.315,25.94 U1.5 ; v1(151.315,25.9) 151.315,25.735 151.902,25.148 152.898,25.148 C2.2 ; R10.2 R11.2 ; R9.2 156.143,33.57 v1(156.2,33.513) ; v1(156.2,28.4) R11.2 ; R12.2 R11.2
  Bottom Layer w0.2: v1@153.1,20.898 R20.2 ; R21.2@155.65,21.4 v1(156.2,21.4)
  other v1: 153.1,20.8 148.1,21.4
VIN: C5.2 J1.4 L1.1
  other v1: 151.3,21 152.1,21
pads on no net: D1_LED11. D1_LED12. D1_LED21. D1_LED22. D1_LED31. D1_LED32. D1_LED41. D1_LED42. D1_LED51. D1_LED52. D1_LED61. D1_LED62. D1_LED71. D1_LED72. D1_LED81. D1_LED82. J1. U1.7 U1.10
copper on no net:
  other v2: 25.5,26.75 77.5,26.75 89.5,26.75 141.5,26.75

## Polygon pours and split planes (outlines as drawn)
no net on Mechanical 13 (solid): 11.8,17.5
GND on GND "GND_L02_P015" (solid, pour order 15): 20,35 20,20 158,20 158,35
VCC3V3_S on PWR "VCC3V3_S_L03_P017" (solid, pour order 17): 9,35 9,20 158,20 158,35
GND on Top Layer "GND_L01_P027" (solid, pour order 27): 151.2,22.9 151.2,24.5 152.5,24.5 152.5,22.9
GND on Top Layer "GND_L01_P025" (solid, pour order 25): 150.4,22 152.5,22 152.5,23.5 150.4,23.5
VIN on Top Layer "VIN_L01_P023" (solid, pour order 23): 150.4,20.6 152.5,20.6 152.5,21.8 150.4,21.8
VCC3V3_S on Top Layer "VCC3V3_S_L01_P021" (solid, pour order 21): 147.7,22.6 150.1,22.6 150.1,21 147.7,21
NetC4_1 on Top Layer "NETC4_1_L01_P019" (solid, pour order 19): 148.6,23.5 148.6,22.9 150,22.9 150,23.5
VIN on Bottom Layer "VIN_L04_P029" (solid, pour order 29): 150.1,20.6 150.1,24.5 151.1,24.5 151.1,21.7 152.5,21.7 152.5,20.6

## Silkscreen, mask and mechanical layers (free items; w line width, h text height)
Top Overlay:
  text "HERON MK II / PAY-LED V3" at 111.3,30.4 h0.8
  text "!" at 121,26.6 h10
Route Tool Path:
  the board outline again, w0.152
Mechanical 13:
  lines w0.2: 147,20 147,35